# Altium PCB PowerPCB.PcbDoc
Units mil, origin at the board's own origin, x right, y up, seen from the top; angles counter-clockwise.
Board outline 2755.91 x 1960.91 mil, 2 copper layers (Top Layer, Bottom Layer); 40 components, 23 nets, 108 pads, 28 vias.
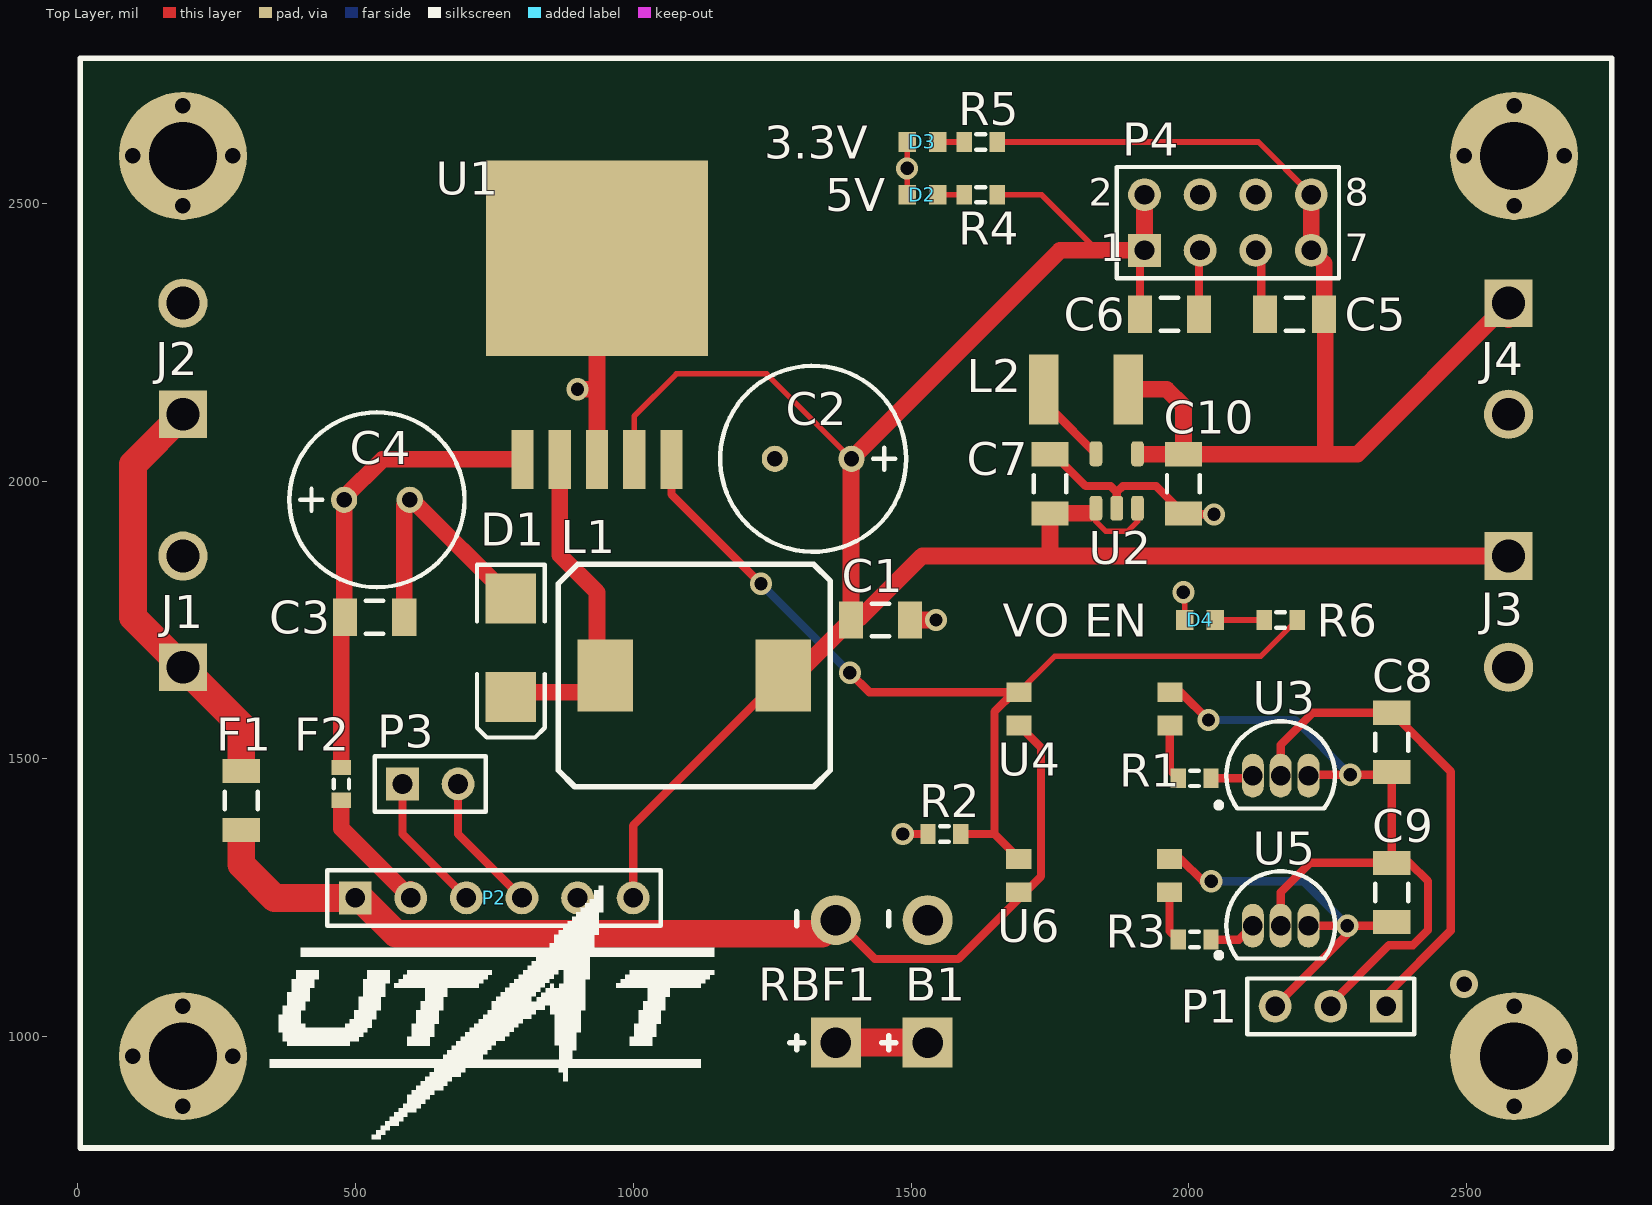
[diagram p0: Top Layer view]
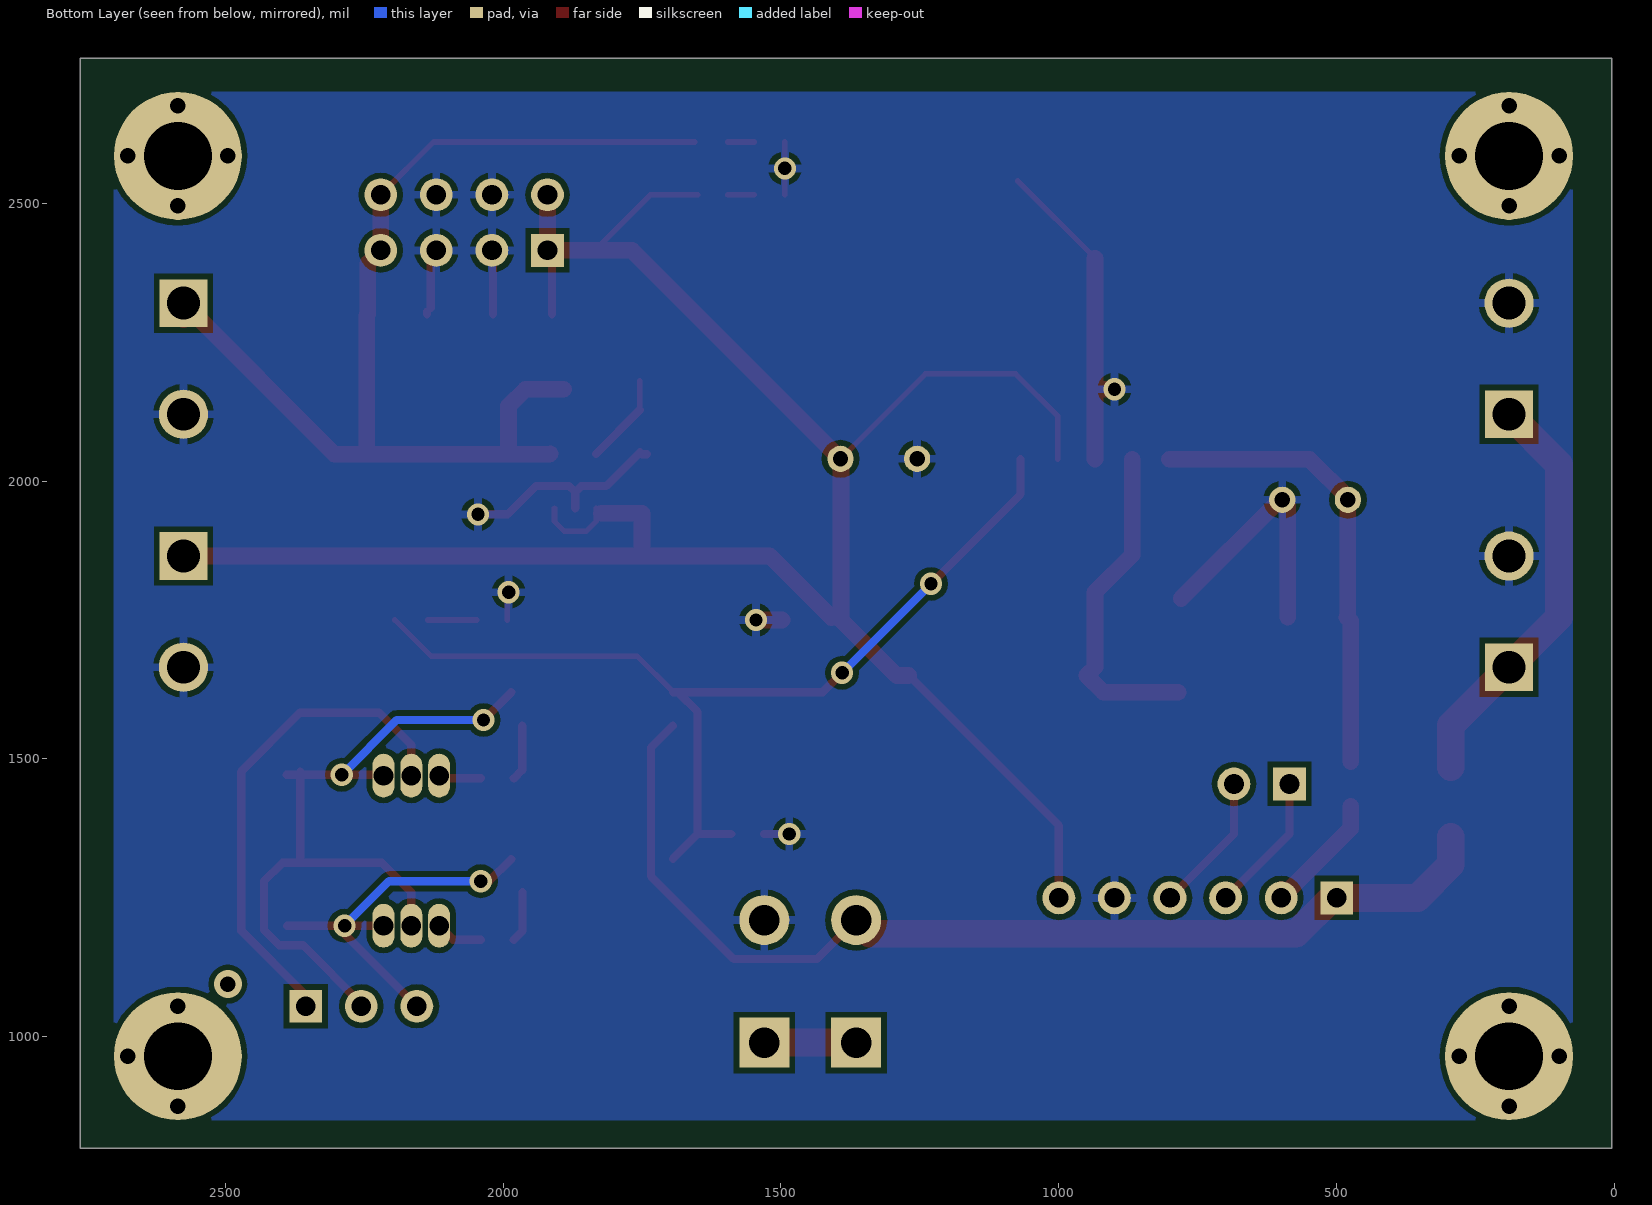
[diagram p1: Bottom Layer view, seen from below]

## Layer stack, top to bottom
Top Solder: solder mask 0.4, Solder Resist, Dk 3.5
Top Layer: signal copper 1.4
Dielectric 1: dielectric 12.6, FR-4, Dk 4.8
Bottom Layer: signal copper 1.4
Bottom Solder: solder mask 0.4, Solder Resist, Dk 3.5

## Board outline
5,800 5,2760.91 2760.91,2760.91 2760.91,800

## Design rules (kind name [scope] priority, off if disabled: settings)
Clearance [All] p1: gap=10 ignorepadtopadclearanceinfootprint=FALSE except(0: Arc-Hole Track-Hole SMDPad-Hole THPad-Hole Via-Hole Fill-Hole Poly-Hole Region-Hole Text-Hole)
PolygonConnect [All] p1: connectstyle=Relief reliefconductorwidth=15 reliefentries=4 polygonreliefangle="90 Angle" airgapwidth=10
RoutingVias [All] p1: holewidth=28 width=50 viastyle="Through Hole" minholewidth=20 minwidth=30 maxholewidth=28 maxwidth=50
SolderMaskExpansion [All] p1: expansion=4
Width [All] p1: maxlimit=50 minlimit=10 preferedwidth=15 minimp=50.000000 maximp=50.000000 favimp=50.000000
30 further rules are at their usual default settings.

## Components (designator, comment, footprint, x,y, rotation, side; value= is the part's Value field where it differs from the comment)
B1 "15A 2P TERM BLOCK, BLACKtested: NO" "Mini-Fit 2 Pin Molex" 1530,989.65 r90 top
C1 "Cap Semi" C1206 1445,1750 r180 top value=0.1uF
C2 "Cap2" "47 uF Cap" 1392.8,2040 r180 top value=47uF
C3 "Cap Semi" C1206 535,1755 r180 top value=0.1uF
C4 "Cap2" "680 uF Cap" 480,1966.26 r0 top value=680uF
C5 "Cap Semi" C1206 2190,2300 r0 top value=0.1uF
C6 "Cap Semi" C1206 1965,2300 r180 top value=0.1uF
C7 "Cap Semi" C1206 1750,1995 r270 top value=10uF
C8 "Cap Semi" C1206 2365,1530 r90 top value=0.1uF
C9 "Cap Semi" C1206 2365,1260 r90 top value=0.1uF
C10 "Cap Semi" C1206 1990,1995 r90 top value=22uF
D1 "D Schottky" SMB 780,1700 r270 top
D2 "5V" 1608[0603] 1520.47,2515 r180 top
D3 "3.3V" 1608[0603] 1520.47,2610 r180 top
D4 "VO EN" 1608[0603] 2020,1750 r180 top
F1 "6A" C1206 295,1425 r270 top
F2 "3A" J1-0603 475,1455 r90 top
J1 "15A 2P TERM BLOCK, BLACKtested: NO" 1760490000 190,1665 r90 top locked
J2 "15A 2P TERM BLOCK, BLACKtested: NO" 1760490000 190,2120 r90 top
J3 "15A 2P TERM BLOCK, BLACKtested: NO" 1760490000 2575,1865 r270 top
J4 "15A 2P TERM BLOCK, BLACKtested: NO" 1760490000 2575,2320 r270 top
L1 "33uH]" Inductor 1110,1650 r0 top
L2 "1uH" INDC4532X34N 1815,2165 r180 top
P1 "Header 3" HDR1X3 2355,1055 r180 top
P2 "INA219 Breakout" HDR1X6 500,1250 r0 top
P3 "I2C" HDR1X2 585,1455 r0 top
P4 "Power Connector" HDR2X4 1920,2415 r0 top
R1 "Res3" J1-0603 2010,1465 r180 top value=100
R2 "Res3" J1-0603 1560,1365 r0 top value=10K
R3 "Res3" J1-0603 2010,1175 r180 top value=100
R4 "Res3" J1-0603 1625.47,2515 r0 top value=220
R5 "Res3" J1-0603 1625.47,2610 r0 top value=220
R6 "Res3" J1-0603 2165,1750 r0 top value=220
RBF1 "Mini-Fit 2 Pin Molex" "Mini-Fit 2 Pin Molex" 1364.65,989.65 r90 top
U1 "LM2592HVS-5.0" *TO170P1435X457-5N 935,2395 r0 top
U2 "SC189" SOT95P280X145-5N 1870,2000 r90 top
U3 "S-80833C" TO-92A 2165,1470 r270 top
U4 "306060007" SOP-4 1820,1610 r90 top
U5 "S-80833C" TO-92A 2165,1200 r270 top
U6 "306060007" SOP-4 1819.33,1310 r90 top

## Footprints (in the part's own frame and the unit in brackets; to place one, negate y for a bottom-side part, rotate by r counter-clockwise, add the part's x,y. Pads: shape width x height; smd on the part's side, far side on the other; paste and mask are expansions set on the pad)
"47 uF Cap" [mm] "Capacitor; 2 Leads"
  round 1.2 hole 0.7: 1(0,0) 2(3.5,0)
  silkscreen extent -2.5,-4.25 6,4.25
"680 uF Cap" [mm] "Capacitor; 2 Leads"
  round 1.2 hole 0.7: 1(0,0) 2(3,0)
  silkscreen extent -2.5,-4 5.5,4
1608[0603] [mm] "Chip Capacitor, Body 1.6x0.8mm, IPC High Density"
  rect 0.8x0.9 smd: 1(-0.7,0) 2(0.7,0)
  body extent -0.87,-0.48 0.87,0.48, height 1.3
1760490000 [mil]
  rect 85.78x85.78 / inner rect 60x60 / far side rect 85.78x85.78 hole 59.06: 1(0,0)
  round 88.59 / inner round 60 / far side round 88.59 hole 59.06: 2(200,0)
*TO170P1435X457-5N [mil]
  rect 40x106 smd: 1(-134,-356) 2(-67,-356) 3(0,-356) 4(67,-356) 5(134,-356)
  rect 400x352 smd: 6(0,6)
C1206 [mm] "Chip Capacitor, Body 3.2x1.6mm, IPC High Density"
  rect 1.1x1.7 smd: 1(-1.35,0) 2(1.35,0)
  silkscreen extent -0.4,-0.75 0.4,0.75, body extent -1.7,-0.9 1.7,0.9, height 1.3
HDR1X2 [mm] "Connector; Header; 2 Position"
  rect 1.5x1.5 hole 0.9: 1(0,0)
  round 1.5 hole 0.9: 2(2.54,0)
  silkscreen extent -1.27,-1.27 3.81,1.27
HDR1X3 [mm] "Connector; Header; 3 Position"
  rect 1.5x1.5 hole 0.9: 1(0,0)
  round 1.5 hole 0.9: 2(2.54,0) 3(5.08,0)
  silkscreen extent -1.27,-1.27 6.35,1.27
HDR1X6 [mm] "Connector; Header; 6 Position"
  rect 1.5x1.5 hole 0.9: 1(0,0)
  round 1.5 hole 0.9: 2(2.54,0) 3(5.08,0) 4(7.62,0) 5(10.16,0) 6(12.7,0)
  silkscreen extent -1.27,-1.27 13.97,1.27
HDR2X4 [mm] "Connector; Header; 4x2 Position"
  rect 1.5x1.5 hole 0.9: 1(0,0)
  round 1.5 hole 0.9: 2(0,2.54) 3(2.54,0) 4(2.54,2.54) 5(5.08,0) 6(5.08,2.54) 7(7.62,0) 8(7.62,2.54)
  silkscreen extent -1.27,-1.27 8.89,3.81
INDC4532X34N [mil]
  rect 53x126 smd: 1(-76,0) 2(76,0)
Inductor [mil]
  rect 100x130 smd: 1(-160,0) 2(160,0)
  silkscreen extent -245,-200 245,200
J1-0603 [mm] "Chip Resistor, Body 1.6x0.8mm, IPC High Density"
  rect 0.7x0.9 smd: 1(-0.75,0) 2(0.75,0)
  silkscreen extent -0.2,-0.35 0.2,0.35, body extent -0.85,-0.48 0.85,0.48, height 0.9
"Mini-Fit 2 Pin Molex" [mil]
  rect 90x90 hole 55: 1(0,0)
  round 90 hole 55: 2(220.47,0)
  silkscreen extent -13,58 235,82
SMB [mm] "DO-214-AA/SMB; 2 C-Bend Leads; Body 5.3 x 3.6 mm, inc. leads (LxW)"
  rect 2.3x2.3 smd: 1(-2.25,0) 2(2.25,0)
  silkscreen extent -3.8,-1.55 4.1,1.55
SOP-4 [mil]
  rect 35.43x45.28 smd: 1(-50,-145.67) 2(10,-145.67) 3(10,125.67) 4(-50,125.67)
SOT95P280X145-5N [mil]
  rrect50% 44.88x22.83 smd: 1(-49.02,37.4) 2(-49.02,0) 3(-49.02,-37.4) 4(49.02,-37.4) 5(49.02,37.4)
TO-92A [mm] "TO, Flat Index; 3 In-Line, Axial Leads; Body Dia. 4.5mm; Leads 0.51 x 0.48 mm (max)"
  oval 2x1 hole 0.9: 1(0,-1.27) 2(0,0) 3(0,1.27)
  silkscreen extent -2.48,-2.95 1.5,2.48, body extent -2.48,-2.5 1.5,2.5, height 6.86

## Part data
B1 J1 J2 J3 J4: library part 1760510000, Package=1760490000, DeviceSetName=1760510000, GateName_1=G$1, LibraryName=PowerBoardLib1, SymbolName_1=CONN2
C1 C3 C5 C6 C7 C8 C9 C10: "Capacitor (Semiconductor SIM Model)", LatestRevisionDate=29-May-2009, LatestRevisionNote="IPC-7351 Footprint Added.", PackageDescription="Chip Capacitor", PackageReference=C1206, Published=8-Jun-2000, Publisher="Altium Limited"
C2 C4: "Capacitor", PackageDescription="Capacitor; 2 Leads", PackageReference=CAPR5-4X5, Published=23-Sep-2002, Publisher="Altium Limited"
D1: "Schottky Diode", Code_JEDEC=DO-214-AA, LatestRevisionDate=17-Jul-2002, LatestRevisionNote="Re-released for DXP Platform.", PackageDescription="DO-214-AA/SMB; 2 C-Bend Leads; Body 5.3 x 3.6 mm, inc. leads (LxW)", PackageReference=SMB, Published=8-Jun-2000, Publisher="Altium Limited"
D2 D3 D4: library part LED1, "Typical RED GaAs LED", LatestRevisionDate=08-Jul-2005, LatestRevisionNote="Mech Layer 1 removed.", PackageDescription="LED; 2 Leads", PackageReference=LED-1, Published=8-Jun-2000, Publisher="Altium Limited"
F1 F2: library part "Fuse 1", "Fuse", LatestRevisionDate=17-Jul-2002, LatestRevisionNote="Re-released for DXP Platform.", PackageDescription="Thru-Hole; 2 Leads", PackageReference=PIN-W2/E2.8, Published=8-Jun-2000, Publisher="Altium Limited"
L1 L2: library part Inductor
P1: "Header, 3-Pin", LatestRevisionDate=17-Jul-2002, LatestRevisionNote="Re-released for DXP Platform.", Publisher="Altium Limited"
P2: library part "Header 6", "Header, 6-Pin", LatestRevisionDate=17-Jul-2002, LatestRevisionNote="Re-released for DXP Platform.", Publisher="Altium Limited"
P3: library part "Header 2", "Header, 2-Pin", LatestRevisionDate=17-Jul-2002, LatestRevisionNote="Re-released for DXP Platform.", Publisher="Altium Limited"
P4: library part "Header 4X2", "Header, 4-Pin, Dual row", LatestRevisionDate=17-Jul-2002, LatestRevisionNote="Re-released for DXP Platform.", Publisher="Altium Limited"
R1 R2 R3 R4 R5 R6: "Resistor", LatestRevisionDate=29-May-2009, LatestRevisionNote="IPC-7351 Footprint Added.", PackageDescription="Chip Resistor", PackageReference=J1-0603, Published=8-Jun-2000, Publisher="Altium Limited"
RBF1: library part "5557 5569 Mini-Fit 2 Pin Molex"
U2: library part SC189ZSKTRT_1, Manufacturer="Semtech Corporation", Package=SOT95P280X145-5N, DeviceSetName=SC189ZSKTRT, GateName_1=G$1, LibraryName=PowerBoardLib1, SymbolName_1=SC189ZSKTRT
U4 U6: library part SMD-PHOTOCOUPLER-5KV-LTV-816S(4P-4.6X6.5MM), MPN=LTV-816S, Package=SMD4-2.54-4.6X6.5MM, DeviceSetName=SMD-PHOTOCOUPLER-5KV-LTV-816S(4P-4.6X6.5MM), GateName_1=G$1, LibraryName=PowerBoardLib1, SymbolName_1=PHOTOCOUPLER-LTV-816S

## Free pads (board coordinates)
  round 230 hole 122.05: Mount(190,965) Mount(190,2585) Mount(2585,965) Mount(2585,2585)

## Via types
v1: diameter 50, hole 28, Top Layer to Bottom Layer, 16 vias
v2: diameter 40/40 (per signal layer), hole 24, Top Layer to Bottom Layer, 12 vias

## Nets (pads, with @x,y where several pads share a name; then routed paths per layer and width w, separated by ;. In a path a pad name is that pad's centre, name@x,y a point inside that pad or via, vN(x,y) a via of type N, cw(c..) or ccw(c..) an arc to the next point about the centre after c; other vN are vias at no path point)
+3.3VDC: C5.2 C10.2 J4.1 L2.1 P4.7 P4.8 R5.2 U2.4 | length 2098.9
  Top Layer w10: R5.2 2125,2610 P4.8 ; U2.4 U2.4@1915,2049.02
  Top Layer w15: L2.1@1890,2160 L2.1@1890,2165
  Top Layer w30: L2.1 1960,2165 1990,2135 C10.2 ; U2.4@1915,2049.02 1915.87,2048.15 C10.2 ; P4.7@2217.5,2412.5 P4.7@2220,2410 ; P4.8 P4.7 2243.15,2391.85 C5.2 2245,2298.15 2245,2048.15 ; J4.1@2575,2290 J4.1 2303.15,2048.15 2245,2048.15 ; C10.2 2245,2048.15
+5VDC: C1.2 C2.1 C6.2 C7.2 J3.1 L1.2 P2.6 P4.1 P4.2 R4.2 U1.4 U2.1 U2.3 | length 4177.3
  Top Layer w10: U1.4 1002,2117 1077.74,2192.74 1240.06,2192.74 C2.1 ; R4.2@1650,2515 R4.2 1735,2515 1835,2415 1840,2415 ; U2.1@1823.47,1941.85 U2.1 1832.6,1927.4 1850,1910 1890,1910 1907.4,1927.4 U2.3
  Top Layer w15: P2.6 1000,1380 L1.2 ; C6.2 1911.85,2406.85 P4.1
  Top Layer w30: L1.2 1291.85,1650 C1.2 1391.85,2039.06 C2.1 1767.8,2415 1835,2415 ; C1.2@1409.37,1754.37 1520,1865 1750,1865 ; U2.1@1823.47,1941.85 C7.2 1750,1865 ; 1840,2415 P4.1 P4.2 ; J3.1 1750,1865
  Bottom Layer w15: J3.1 J3.1@2575,1875
GND: B1.2 C1.1 C2.2 C3.1 C4.2 C5.1 C6.1 C7.1 C10.1 D1.1 D2.2 D3.2 D4.2 J1.2 J2.2 J3.2 J4.2 P2.5 P4.3 P4.4 P4.5 P4.6 R2.1 U1.3 U1.6 U2.2 | length 1920.6
  Top Layer w10: U1.6 U1.6@1074,2540 ; D2.2 v2(1492.91,2562.5) D3.2 ; D4.2 v2@1992.44,1797.56
  Top Layer w15: v2(1485,1365) R2.1 ; B1.2@1530,1190 B1.2@1530.47,1190.47 ; C7.1@1741.6,2048.15 C7.1 1753.43,2051.57 1814.08,1990.92 1859.08,1990.92 1870,1980 ; U2.2 1870,1980 ; v2(1990,1800) v2@1992.44,1797.56 ; C6.1 2018.15,2413.15 P4.3 ; v2(2045,1940) 1991.85,1940 C10.1 1940.93,1990.92 1880.92,1990.92 1870,1980 ; P4.5 2130,2405 C5.1@2130,2311.85 ; C5.1 C5.1@2136.85,2305
  Top Layer w30: C3.1 588.15,1956.3 C4.2 602.32,1966.26 D1.1 ; v2(900,2165) 935,2165 ; U1.3 935,2165 ; U1.6 935,2165 ; C1.1 v2(1545,1750)
NetB1_1: B1.1 RBF1.1 | length 165.4
  Top Layer w50: RBF1.1 B1.1
NetC8_1: C8.1 C9.2 P1.2 U3.3 U4.2 U5.2 | length 1377.7
  Top Layer w15: U4.2@1985,1620 v2(2035,1570) ; U5.2 2165,1260 2218.15,1313.15 C9.2 ; U3.3@2224.06,1471.46 v2(2290,1471.46) C8.1@2365,1471.46 ; P1.2@2252.5,1057.5 2360,1165 2403.02,1165 2430,1191.98 2430,1280 2396.85,1313.15 C9.2 ; C8.1 C8.1@2365,1471.46 ; C8.1@2389.61,1471.46 C8.1@2365,1471.46 ; C9.2 C8.1@2365,1471.46
  Bottom Layer w15: v2(2035,1570) 2191.46,1570 v2(2290,1471.46)
NetC8_2: C8.2 P1.1 U3.2 | length 899.2
  Top Layer w15: U3.2@2165,1471.46 2165,1525 2223.15,1583.15 C8.2 2470.96,1477.18 2470.96,1190.96 2357.5,1077.5 P1.1@2357.5,1052.5
NetC9_1: C9.1 P1.3 U5.3 U6.2 | length 712.6
  Top Layer w15: U6.2@1985,1320 2025,1280 v2(2040,1280) ; P1.3 2285,1185 v2(2285,1200) ; U5.3@2224.06,1200 v2(2285,1200) ; C9.1@2388.15,1200 v2(2285,1200)
  Bottom Layer w15: v2(2040,1280) 2205,1280 v2(2285,1200)
NetD1_2: D1.2 L1.1 U1.2 | length 600.4
  Top Layer w30: D1.2@785,1620 920,1620 L1.1 935,1665 935,1800 868,1867 U1.2
NetD2_1: D2.1 R4.1 | length 47.9
  Top Layer w10: D2.1 R4.1
NetD3_1: D3.1 R5.1 | length 47.9
  Top Layer w10: D3.1 R5.1
NetD4_1: D4.1 R6.1 | length 87.9
  Top Layer w10: D4.1 R6.1
NetF1_1: F1.1 J1.1 J2.1 | length 760.1
  Top Layer w50: J2.1 100,2030 100,1755 J1.1 295,1560 F1.1@295,1485
  Bottom Layer w50: J1.1@185,1660 J1.1
NetF2_1: F2.1 P2.2 | length 231.8
  Top Layer w30: F2.1@475,1415 475,1375 P2.2 P2.2@600,1265
NetL2_2: L2.2 U2.5 | length 163.5
  Top Layer w10: L2.2@1754,2127.62 L2.2@1754,2180
  Top Layer w15: L2.2@1754,2127.62 U2.5
NetP2_3: P2.3 P3.1 | length 252.6
  Top Layer w15: P3.1 585,1365 P2.3
NetP2_4: P2.4 P3.2 | length 252.6
  Top Layer w15: P3.2 685,1365 P2.4
NetR1_1: R1.1 U3.1 | length 77.5
  Top Layer w15: R1.1 2110,1465 U3.1
NetR1_2: R1.2 U4.1 | length 101.1
  Top Layer w15: U4.1 1965.67,1479.8 R1.2
NetR2_2: R2.2 R6.2 U1.5 U4.3 U6.3 | length 1782.5
  Top Layer w10: U4.3@1693.66,1620 1758.66,1685 2129.53,1685 R6.2
  Top Layer w15: U1.5 1069,1976 v2(1230,1815) ; v2(1390,1655) 1425,1620 U4.3@1685,1620 ; R2.2 1650,1365 ; U4.3@1693.66,1620 U4.3@1685,1620 ; U6.3@1694.33,1320.67 1650,1365 ; 1650,1365 1650,1585 U4.3@1685,1620
  Bottom Layer w15: v2(1230,1815) v2(1390,1655)
NetR3_1: R3.1 U5.1 | length 85.8
  Top Layer w15: R3.1 2090,1175 U5.1
NetR3_2: R3.2 U6.1 | length 91.4
  Top Layer w15: U6.1 1965,1190.47 R3.2
VBAT: F1.2 P2.1 RBF1.2 U4.4 U6.4 | length 1928.8
  Top Layer w15: RBF1.2 1434.76,1140 1585,1140 1733.8,1288.8 1733.8,1520.53 U4.4
  Top Layer w50: F1.2@295,1360 295,1310 355,1250 P2.1 508.74,1250 573.27,1185.47 1340,1185.47 RBF1.2
VMON: C3.2 C4.1 F2.2 U1.1 | length 828.2
  Top Layer w30: F2.2@475,1495 475,1748.15 C3.2 480,1756.85 C4.1 480,1970 549,2039 U1.1
copper on no net:
  other v1: 190,875 2585,875 100,965 280,965 2675,965 190,1055 2585,1055 2495,1095 190,2495 2585,2495 100,2585 280,2585 2495,2585 2675,2585 190,2675 2585,2675

## Polygon pours and split planes (outlines as drawn)
GND on Bottom Layer "Bottom Layer-GND" (solid, pour order 0): 75,2700 2700,2700 2700,850 75,850

## Silkscreen, mask and mechanical layers (free items; w line width, h text height)
Top Overlay:
  drawing of 8 lines, arcs and shapes, not listed

## Dimensions
2585,2585 to 2585,965 on Top Layer
2585,2585 to 2760.91,2770.91 on Top Layer
2585,2585 to 2770.91,2760.91 on Top Layer
1920,2415 to 2760.91,2760.91 on Top Layer
1920,2415 to 2760.91,2760.91 on Top Layer

## Text inside footprints (layer, text, board x,y; h text height)
P4: Top Overlay "8" at 2280,2495 h50; Top Overlay "7" at 2280,2395 h50; Top Overlay "1" at 1840,2395 h50; Top Overlay "2" at 1820,2495 h50